# Altium PCB my.PcbDoc
Units mil, origin at the board's own origin, x right, y up, seen from the top; angles counter-clockwise.
Board outline 4170.03 x 3910.03 mil, 2 copper layers (Top Layer, Bottom Layer); 77 components, 66 nets, 230 pads, 22 vias.
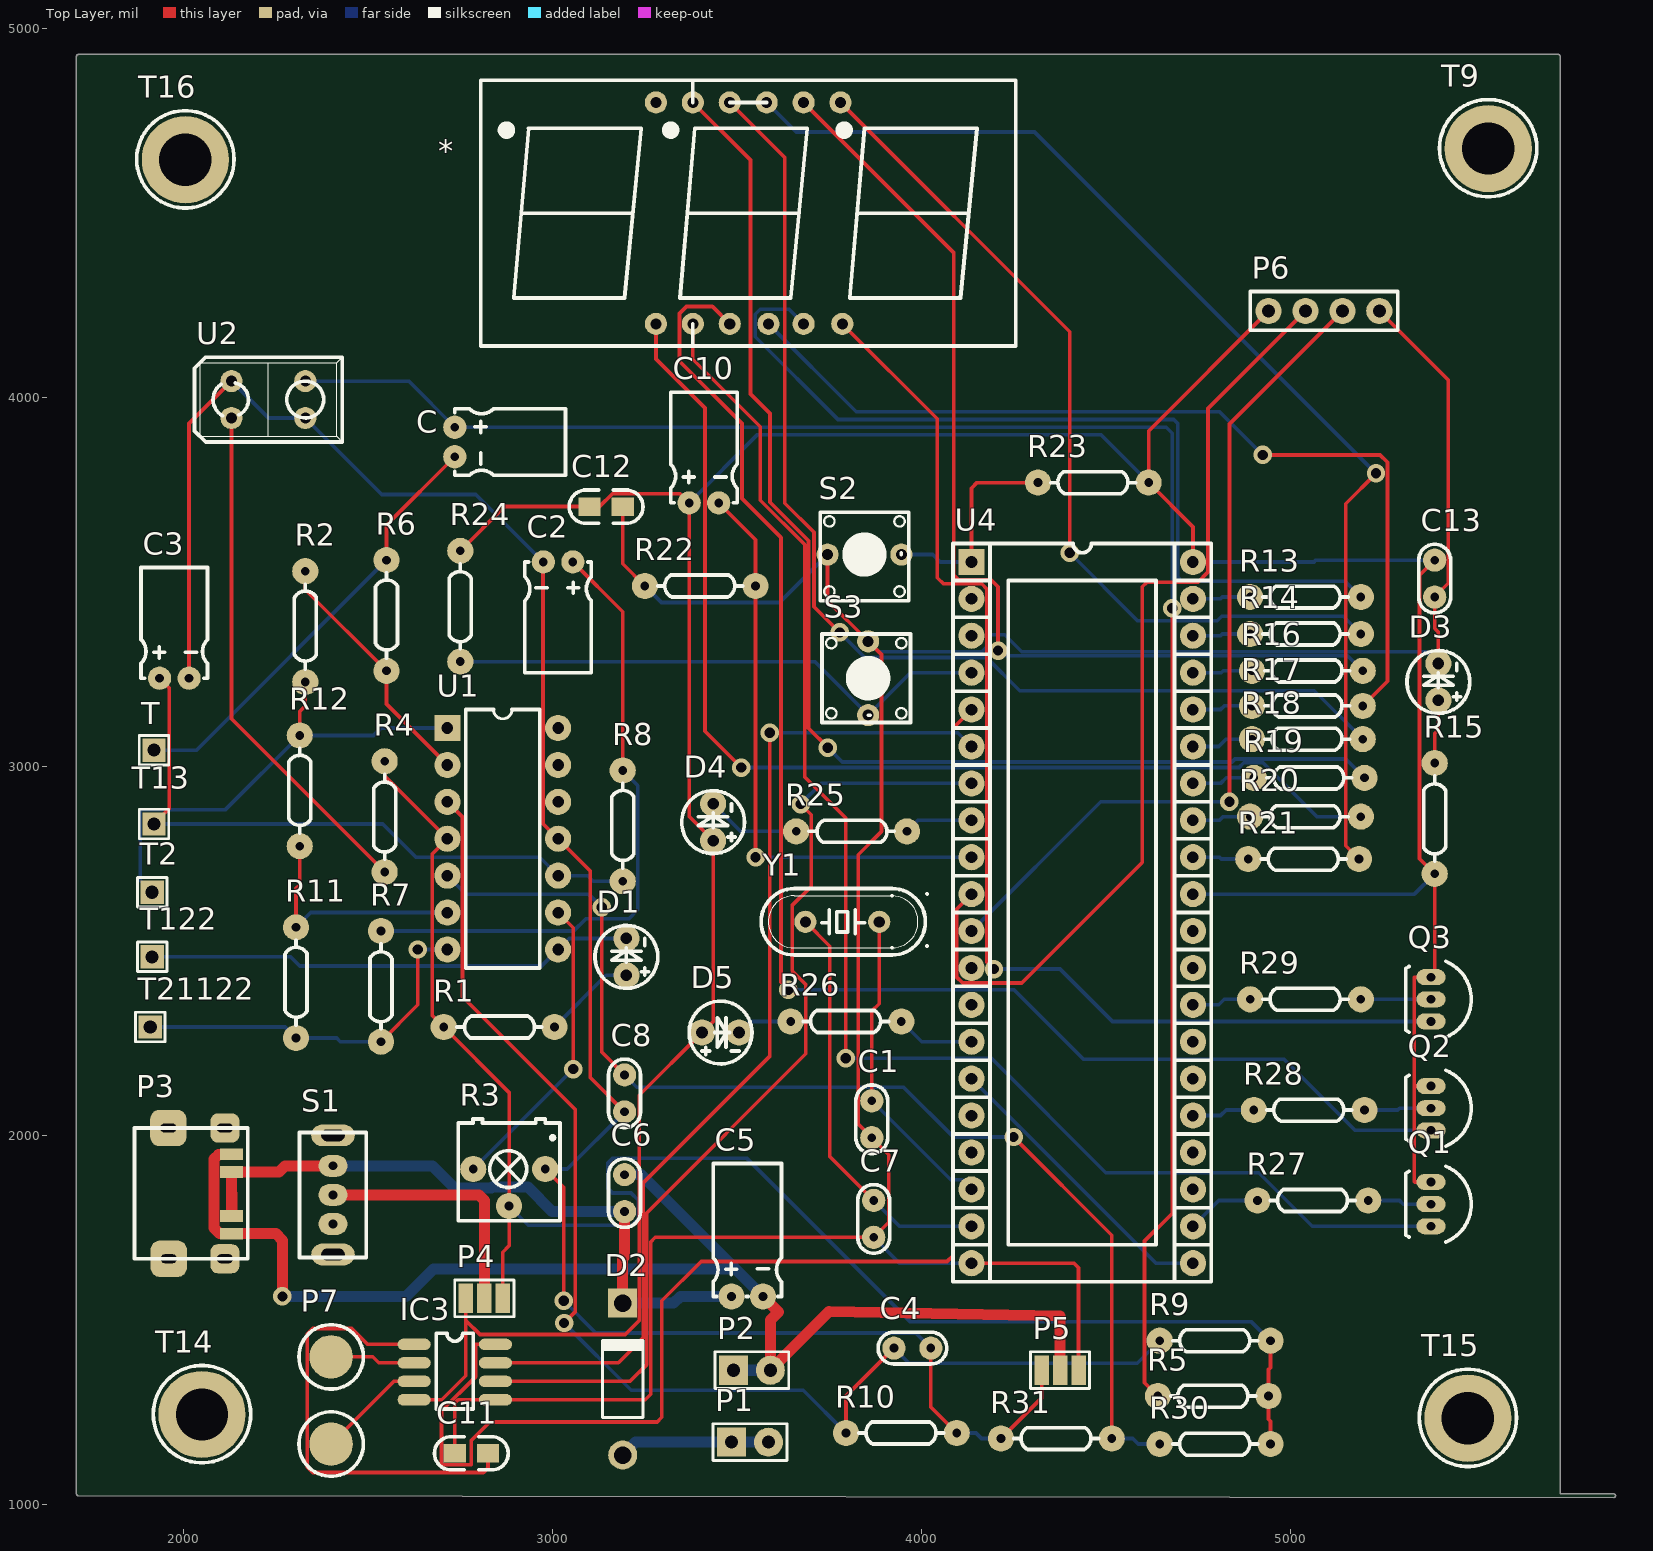
[diagram p0: Top Layer view]
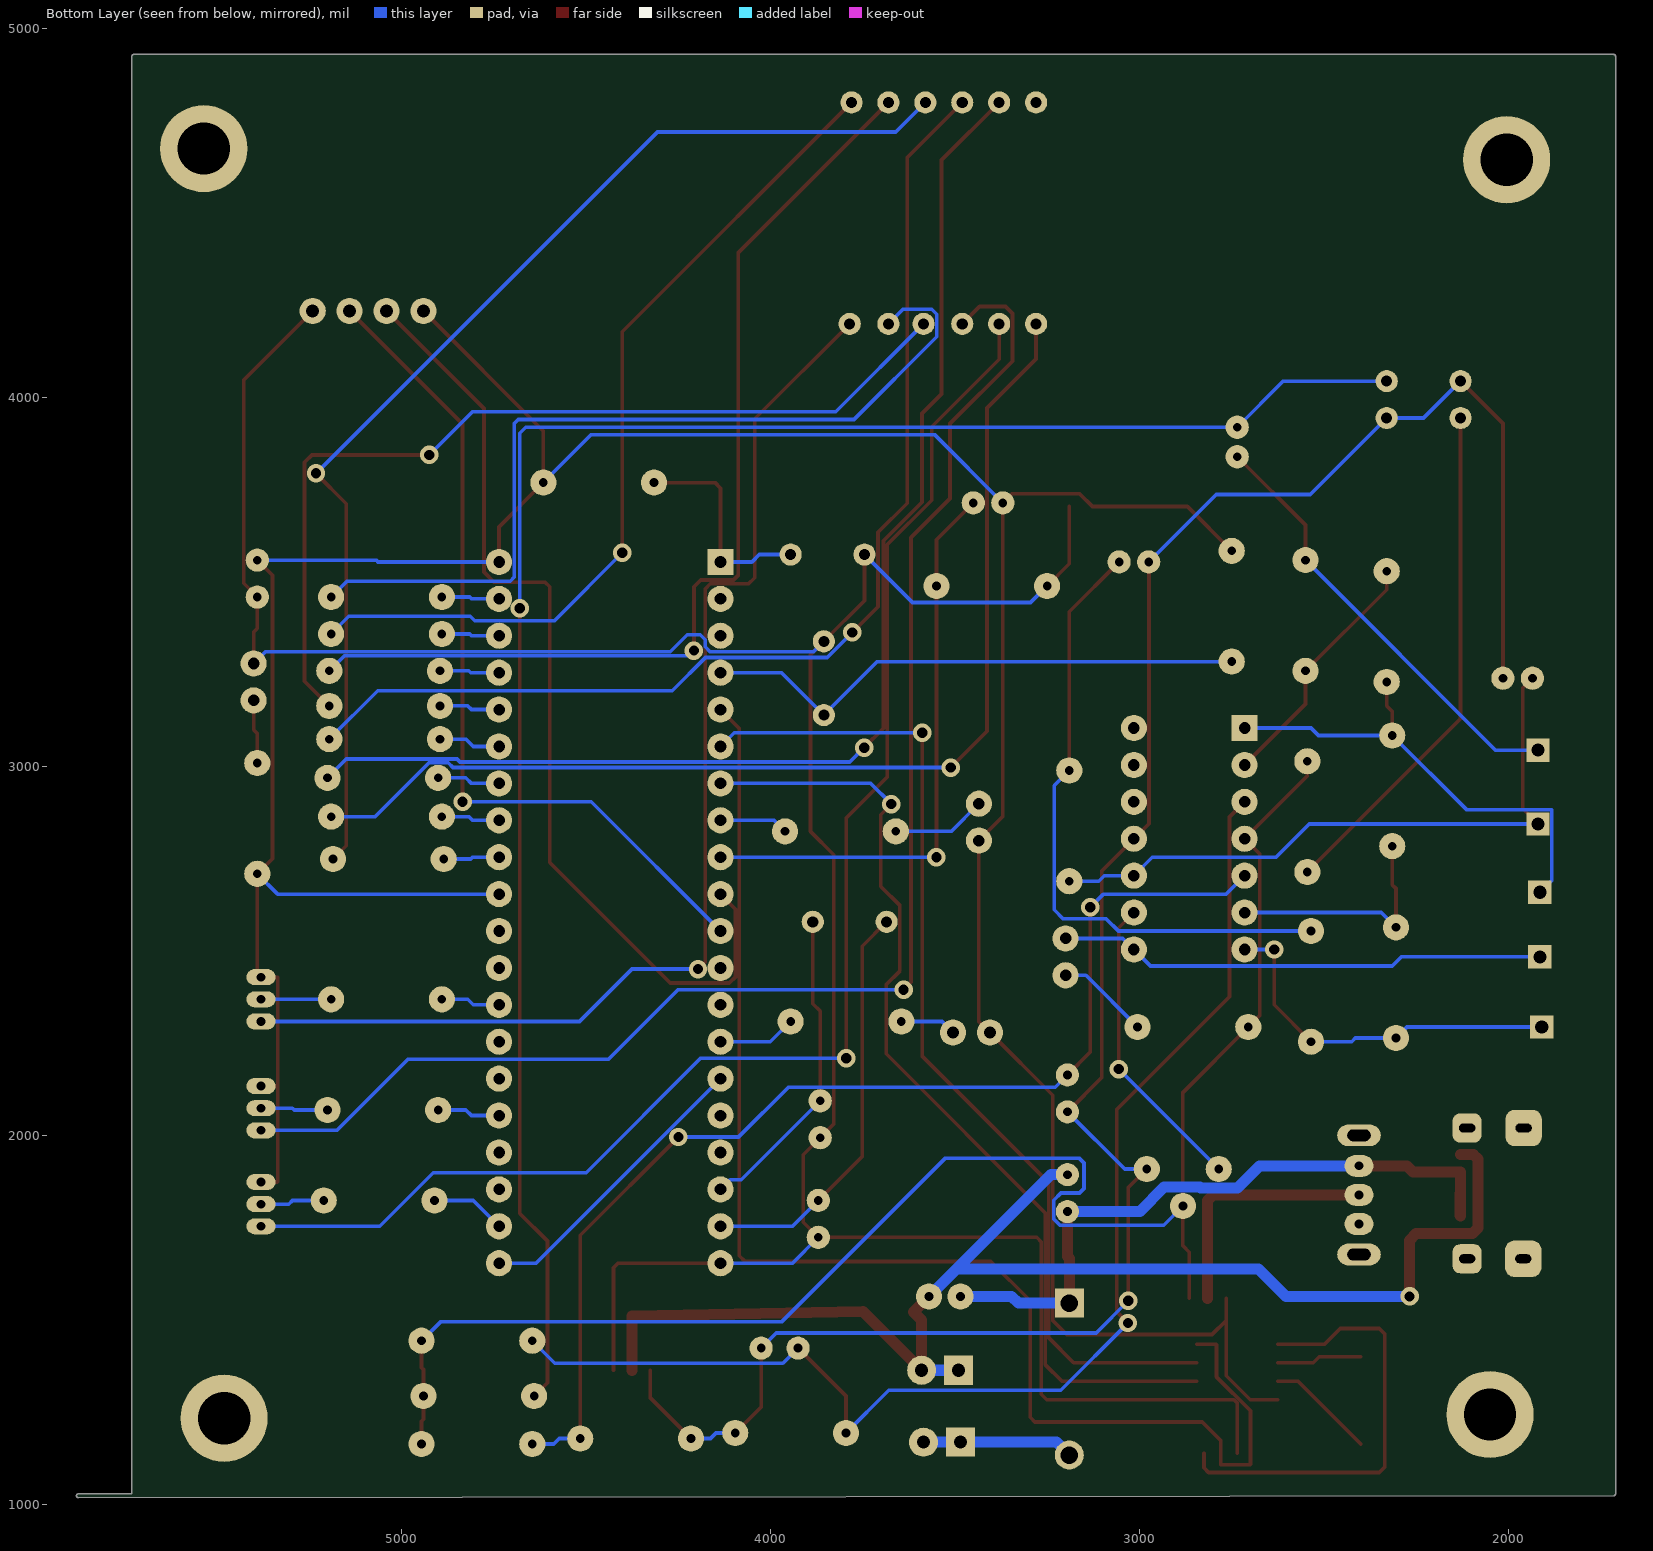
[diagram p1: Bottom Layer view, seen from below]

## Layer stack, top to bottom
Top Solder: solder mask 0.4, Solder Resist, Dk 3.5
Top Layer: signal copper 1.4
Dielectric 1: dielectric 12.6, FR-4, Dk 4.8
Bottom Layer: signal copper 1.4
Bottom Solder: solder mask 0.4, Solder Resist, Dk 3.5

## Board outline
1709.98,1030 ccw(c1715,1030) 1714.99,1024.98 5874.99,1019.99 ccw(c5875,1025) 5880.02,1025 ccw(c5875,1025) 5875.01,1030.02 5730.02,1030.19 5730.02,4925 ccw(c5725,4925) 5725,4930.02 1715,4930.02 ccw(c1715,4925) 1709.98,4925

## Design rules (kind name [scope] priority, off if disabled: settings)
Clearance [All] p1: gap=0.25 ignorepadtopadclearanceinfootprint=TRUE
HoleSize [All] p1: absolutevalues=TRUE maxlimit=300 minlimit=1 maxpercent=80.000 minpercent=20.000
MinimumSolderMaskSliver [All] p1: minsoldermaskwidth=0
PolygonConnect [All] p1: connectstyle=Relief reliefconductorwidth=10 reliefentries=4 polygonreliefangle="90 Angle" airgapwidth=10
RoutingVias [All] p1: holewidth=28 width=50 viastyle="Through Hole" minholewidth=28 minwidth=50 maxholewidth=28 maxwidth=50
SilkToSilkClearance [All] p1: silktosilkclearance=0
SilkToSolderMaskClearance [IsPad] p1: minsilkscreentomaskgap=0 clearancetoexposedcopper=TRUE
SolderMaskExpansion [All] p1: expansion=4 istentingtop=FALSE
Width Width_ag [InNet('AGND')] p1: maxlimit=30 minlimit=10 preferedwidth=10 minimp=50.000000 maximp=50.000000 favimp=50.000000
Width Width_g [InNet('GND')] p2: maxlimit=30 minlimit=10 preferedwidth=30 minimp=50.000000 maximp=50.000000 favimp=50.000000
Width Width_51 [InNet('+5V1')] p3: maxlimit=30 minlimit=10 preferedwidth=30 minimp=50.000000 maximp=50.000000 favimp=50.000000
Width Width_5v [InNet('+5.7V')] p4: maxlimit=30 minlimit=10 preferedwidth=30 minimp=50.000000 maximp=50.000000 favimp=50.000000
Width Width_5 [InNet('+5V')] p5: maxlimit=30 minlimit=10 preferedwidth=30 minimp=50.000000 maximp=50.000000 favimp=50.000000
Width Width_1 [All] p6: maxlimit=10 minlimit=10 preferedwidth=10
26 further rules are at their usual default settings.

## Components (designator, comment, footprint, x,y, rotation, side; value= is the part's Value field where it differs from the comment)
* "tt" smg 3535,4740 r180 top
C "Cap Pol1" cd-0.1t 2735,3920 r0 top value=10uF
C1 "Cap" C-0.1 3865,1995 r90 top value=30pF
C2 "Cap Pol1" cd-0.1t 3055,3555 r270 top value=0.47uF
C3 "Cap Pol1" cd-0.1t 1935,3240 r90 top value=0.47uF
C4 "Cap" C-0.1 4025,1425 r180 top value=104
C5 "Cap Pol1" CD-0.2T 3485,1565 r90 top value=100uF
C6 "Cap" C-0.1 3195,1795 r90 top value=104
C7 "Cap" C-0.1 3870,1825 r270 top value=30pF
C8 "Cap" C-0.1 3195,2065 r90 top value=100pF
C10 "Cap Pol1" cd-0.1t 3370,3715 r90 top value=100pF
C11 "Cap" C0805R 2825,1140 r180 top value=100pF
C12 "Cap" C0805R 3190,3705 r180 top value=100pF
C13 "Cap" C-0.1 5390,3560 r270 top value=104
D1 "LED0" LED3 3200,2435 r90 top
D2 "Diode 1N4007" DO-41 3190,1340.91 r90 top
D3 "LED0" LED3 5400,3180 r90 top
D4 "LED0" LED3 3435,2800 r90 top
D5 "LED0" LED3 3405,2280 r0 top
IC3 "NY3P065" sop8 2755,1345 r0 top
P1 "Header 2" SIP2 3485,1170 r0 top
P2 "Header 2" SIP2 3490,1365 r0 top
P3 "Header 6" USBTYPEC6 2112,1667 r90 top
P4 "Header 3" JUMP3 2865,1560 r0 top
P5 "Header 3" JUMP3 4325,1365 r180 top
P6 "Header 4" SIP4 4940,4235 r0 top
P7 "Header 2" BEEP2 2400,1401.22 r270 top
Q1 "2N3906" TO92C 5380,1875 r270 top
Q2 "2N3906" TO92C 5380,2135 r270 top
Q3 "2N3906" TO92C 5380,2430 r270 top
R1 "Res2" R-0.3 3005,2295 r180 top value=1K
R2 "Res2" R-0.3 2330,3530 r270 top value=300K
R3 "RPot" 3362P 2980,1910 r180 top value=10K
R4 "Res2" R-0.3 2545,2715 r90 top value=2K
R5 "Res2" R-0.3 4640,1295 r0 top value=30K
R6 "Res2" R-0.3 2550,3560 r270 top value=3K
R7 "Res2" R-0.3 2535,2255 r90 top value=3K
R8 "Res2" R-0.3 3190,2990 r270 top value=30K
R9 "Res2" R-0.3 4645,1445 r0 top value=180K
R10 "Res2" R-0.3 3795,1195 r0 top value=100K
R11 "Res2" R-0.3 2305,2565 r270 top value=300K
R12 "Res2" R-0.3 2315,3085 r270 top value=3K
R13 "" R-0.3 4890,3460 r0 top value=100
R14 "" R-0.3 4890,3360 r0 top value=100
R15 "Res2" R-0.3 5390,2710 r90 top value=1K
R16 "" R-0.3 4895,3260 r0 top value=100
R17 "" R-0.3 4895,3165 r0 top value=100
R18 "" R-0.3 4895,3075 r0 top value=100
R19 "" R-0.3 4900,2970 r0 top value=100
R20 "" R-0.3 4890,2865 r0 top value=100
R21 "" R-0.3 4885,2750 r0 top value=100
R22 "Res2" R-0.3 3250,3490 r0 top value=10K
R23 "Res2" R-0.3 4315,3770 r0 top value=10K
R24 "Res2" R-0.3 2750,3285 r90 top value=10K
R25 "Res2" R-0.3 3960,2825 r180 top value=1K
R26 "Res2" R-0.3 3645,2310 r0 top value=1K
R27 "" R-0.3 4910,1825 r0 top value=4.7K
R28 "" R-0.3 4900,2070 r0 top value=4.7K
R29 "" R-0.3 4890,2370 r0 top value=4.7K
R30 "Res2" R-0.3 4645,1165 r0 top value=180K
R31 "Res2" R-0.3 4215,1180 r0 top value=100K
S1 "SW-SPST" POW3 2405,1918.74 r270 top
S2 "SW-PB" key 3800,3560 r180 top
S3 "SW-PB" key 3840,3285 r90 top
T "TEST" SIP1 1920,3045 r90 top
T2 "TEST" SIP1 1915,2660 r0 top
T9 "TEST" HLS 5535,4675 r0 top
T13 "TEST" SIP1 1920,2845 r0 top
T14 "TEST" HLS 2050,1245 r0 top
T15 "TEST" HLS 5480,1235 r0 top
T16 "TEST" HLS 2005,4645 r0 top
T122 "TEST" SIP1 1915,2485 r90 top
T21122 "TEST" SIP1 1910,2295 r90 top
U1 "LM324AN" DIP14MY 2715,3105 r270 top
U2 "Optoisolator1" sen 2160,4005 r0 top
U4 "P89C51RC2BN/01" DIP40 4135,3555 r0 top
Y1 "XTAL" jz 3790,2570 r0 top

## Footprints (in the part's own frame and the unit in brackets; to place one, negate y for a bottom-side part, rotate by r counter-clockwise, add the part's x,y. Pads: shape width x height; smd on the part's side, far side on the other; paste and mask are expansions set on the pad)
3362P [mm]
  round 1.8 hole 0.6: 1(0,0) 2(2.484,2.54) 3(4.953,0)
  silkscreen extent -1.02,-3.44 5.98,3.56
BEEP2 [mm]
  round 3 smd: 1(0,0) 2(6,0)
  silkscreen extent -2.21,-2.22 8.21,2.22
C0805R [mil]
  rect 60x50 smd: 1(0,0) 2(90,0)
  silkscreen extent -55,-45 145,45
C-0.1 [mm]
  round 1.6 hole 0.6: 1(0,0) 2(2.54,0)
  silkscreen extent -1.09,-1.1 3.63,1.1
cd-0.1t [mm]
  round 1.6 hole 0.6: 1(0,0) 2(0,-2.032)
  silkscreen extent 0,-3.3 7.62,1.27
CD-0.2T [mm]
  round 1.8 hole 0.6: 1(0,0) 2(0,-2.159)
  silkscreen extent 0,-3.43 9.14,1.27
DIP14MY [mm]
  rect 1.8x1.8 hole 0.8: 1(0,0)
  round 1.8 hole 0.8: 2(2.54,0) 3(5.08,0) 4(7.62,0) 5(10.16,0) 6(12.7,0) 7(15.24,0) 8(15.24,7.62) 9(12.7,7.62) 10(10.16,7.62) 11(7.62,7.62) 12(5.08,7.62) 13(2.54,7.62) 14(0,7.62)
  silkscreen extent -1.27,1.27 16.51,6.35
DIP40 [mm]
  rect 1.8x1.8 hole 0.8: 1(0,0)
  round 1.8 hole 0.8: 2(0,-2.54) 3(0,-5.08) 4(0,-7.62) 5(0,-10.16) 6(0,-12.7) 7(0,-15.24) 8(0,-17.78) 9(0,-20.32) 10(0,-22.86) 11(0,-25.4) 12(0,-27.94) 13(0,-30.48) 14(0,-33.02) 15(0,-35.56) 16(0,-38.1) 17(0,-40.64) 18(0,-43.18) 19(0,-45.72) 20(0,-48.26) 21(15.24,-48.26) 22(15.24,-45.72) 23(15.24,-43.18) 24(15.24,-40.64) 25(15.24,-38.1) 26(15.24,-35.56) 27(15.24,-33.02) 28(15.24,-30.48) 29(15.24,-27.94) 30(15.24,-25.4) 31(15.24,-22.86) 32(15.24,-20.32) 33(15.24,-17.78) 34(15.24,-15.24) 35(15.24,-12.7) 36(15.24,-10.16) 37(15.24,-7.62) 38(15.24,-5.08) 39(15.24,-2.54) 40(15.24,0)
  silkscreen extent -1.27,-49.53 16.51,1.27
DO-41 [mm] "Diode, Axial; Body 5.2 x 2.7 mm (LxDia. max), Lead Dia. 0.86 mm (max)"
  round 2 hole 1.2: 1(-5.23,0)
  rect 2x2 hole 1.2: 2(5.23,0)
  silkscreen extent -2.65,-1.4 2.75,1.4
HLS [mm]
  round 6 hole 3.6: 1(0,0)
  silkscreen extent -3.35,-3.32 3.35,3.37
JUMP3 [mm]
  rect 1x2 smd: 1(0,0) 2(-1.27,0) 3(-2.54,0)
  silkscreen extent -3.3,-1.27 0.76,1.27
jz [mil]
  round 60 hole 30: 1(-105,10) 2(95,10)
  silkscreen extent -225,-80 225,100
key [mil]
  round 60 hole 30: 1(-145,-15) 2(55,-15)
  silkscreen extent -165,-130 75,110
LED3 [mm]
  round 1.8 hole 0.8: 1(0,0) 2(2.54,0)
  silkscreen extent -0.89,-2.16 3.43,2.16
POW3 [mm]
  oval 1.5x3 hole 0.8 slot 1.6 at 90 deg: 0(-2.1,0) 0(6.1,0)
  oval 1.5x2 hole 0.6: 1(0,0) 2(2,0) 3(4,0)
  silkscreen extent -2.3,-2.3 6.3,2.3
R-0.3 [mm]
  round 1.8 hole 0.6: 1(0,0) 2(7.62,0)
  silkscreen extent 0.89,-0.76 6.73,0.75
sen [mil]
  round 60 hole 30: 1(-30,-60) 2(-30,40) 3(170,-60) 4(170,40)
  silkscreen extent -130,-125 270,105
SIP1 [mm]
  rect 1.6x1.6 hole 0.9: 1(0,0)
  silkscreen extent -1.02,-1.02 1.02,1.02
SIP2 [mm] "Connector; Header; 2 Position"
  rect 2x2 hole 0.9: 1(0,0)
  round 2 hole 0.9: 2(2.54,0)
  silkscreen extent -1.27,-1.27 3.81,1.27
SIP4 [mm]
  round 1.8 hole 0.9: 1(0,0) 2(2.54,0) 3(5.08,0) 4(7.62,0)
  silkscreen extent -1.27,-1.32 8.89,1.35
smg [mil]
  round 60 hole 30: 1(-245,-60) 2(-145,-60) 3(-45,-60) 4(55,-60) 5(155,-60) 6(255,-60) 7(255,540) 8(155,540) 9(55,540) 10(-50,540) 11(-145,540) 12(-250,540)
  silkscreen extent -720,-120 730,600
sop8 [mil]
  rrect100% 90x31 smd: 1(-130,90) 2(-130,40) 3(-130,-10) 4(-130,-60) 5(90,-60) 6(90,-10) 7(90,40) 8(90,90)
  silkscreen extent -70,-85 30,120
TO92C [mm]
  oval 1.1x2 hole 0.6: 1(0,0) 2(1.524,0) 3(3.048,0)
  silkscreen extent -1.09,-1.74 4.13,2.77
USBTYPEC6 [mm]
  rrect50% 2.5x2.5 hole 0.6 slot 1.1 at 90 deg: 0(0,3.861) 0(9,3.886)
  rrect50% 2x2 hole 0.6 slot 1.1 at 90 deg: 0(0,0) 0(9,0)
  rect 0.8x1.6 smd: 1(1.727,-0.457) 2(2.946,-0.457) 5(5.972,-0.457) 6(7.188,-0.457)
  silkscreen extent 0,-1.57 9,6.22

## Part data
C C2 C3 C5 C10: "Polarized Capacitor (Radial)", LatestRevisionDate=17-Jul-2002, LatestRevisionNote="Re-released for DXP Platform.", PackageDescription="Polarized Capacitor (Radial); 2 Leads", PackageReference=RB7.6-15, Published=8-Jun-2000, Publisher="Altium Limited"
C1 C4 C6 C7 C8 C11 C12 C13: "Capacitor", LatestRevisionDate=17-Jul-2002, LatestRevisionNote="Re-released for DXP Platform.", PackageDescription="Radial Cap, Thru-Hole; 2 Leads; 0.3 in Pin Spacing", PackageReference=RAD-0.3, Published=8-Jun-2000, Publisher="Altium Limited"
D1 D3 D4 D5: "Typical INFRARED GaAs LED", LatestRevisionDate=08-Jul-2005, LatestRevisionNote="Mech Layer 1 removed.", PackageDescription="LED; 2 Leads", PackageReference=LED-0, Published=8-Jun-2000, Publisher="Altium Limited"
D2: "1 Amp General Purpose Rectifier", Code_JEDEC=DO-204-AL, ComponentLink1Description="Manufacturer Link", ComponentLink1URL=http://www.fairchildsemi.com/, ComponentLink2Description=Datasheet, ComponentLink2URL=http://www.fairchildsemi.com/ds/1N%2F1N4001.pdf, DatasheetVersion=1998, LatestRevisionDate=17-Jul-2002, LatestRevisionNote="Re-released for DXP Platform.", PackageDescription="Diode, Axial; Body 5.2 x 2.7 mm (LxDia. max), Lead Dia. 0.86 mm (max)", PackageReference=DO-41, PackageVersion=Aug-1999, Published=8-Jun-2000, Publisher="Altium Limited"
IC3: library part SOUND
P1 P2 P7: "Header, 2-Pin", LatestRevisionDate=17-Jul-2002, LatestRevisionNote="Re-released for DXP Platform.", Publisher="Altium Limited"
P3: "Header, 6-Pin", LatestRevisionDate=17-Jul-2002, LatestRevisionNote="Re-released for DXP Platform.", Publisher="Altium Limited"
P4 P5: "Header, 3-Pin", LatestRevisionDate=17-Jul-2002, LatestRevisionNote="Re-released for DXP Platform.", Publisher="Altium Limited"
P6: "Header, 4-Pin", LatestRevisionDate=17-Jul-2002, LatestRevisionNote="Re-released for DXP Platform.", Publisher="Altium Limited"
Q1 Q2 Q3: "PNP General Purpose Amplifier", ComponentLink1Description="Manufacturer Link", ComponentLink1URL=http://www.fairchildsemi.com/, ComponentLink2Description=Datasheet, ComponentLink2URL=http://www.fairchildsemi.com/ds/2N%2F2N3906.pdf, DatasheetVersion=1997, LatestRevisionDate=15-Jan-2003, LatestRevisionNote="PCB Footprint 'BCY-W3/D4.7' replaced", PackageDescription="TO, Flat Index; 3 In-Line, Axial Leads; Body Dia. 4.5mm; Leads 0.51 x 0.48 mm (max)", PackageReference=TO-92A, PackageVersion=Sep-1998, Published=8-Jun-2000, Publisher="Altium Limited"
R1 R2 R4 R5 R6 R7 R8 R9 R10 R11 R12 R15 R22 R23 R24 R25 R26 R30 R31: "Resistor", LatestRevisionDate=17-Jul-2002, LatestRevisionNote="Re-released for DXP Platform.", PackageDescription="Axial Device, Thru-Hole; 2 Leads; 0.4 in Pin Spacing", PackageReference=AXIAL-0.4, Published=8-Jun-2000, Publisher="Altium Limited"
R3: "Potentiometer", LatestRevisionDate=17-Jul-2002, LatestRevisionNote="Re-released for DXP Platform.", PackageDescription="Variable Resistor, Thru-Hole; 3 Leads", PackageReference=VR5, Published=8-Jun-2000, Publisher="Altium Limited", Set Position=0.5, Sim Note="Enter the Resistance value and the set point into parameter fields."
R13 R14 R16 R17 R18 R19 R20 R21 R27 R28 R29: library part Res2, "Resistor", LatestRevisionDate=17-Jul-2002, LatestRevisionNote="Re-released for DXP Platform.", PackageDescription="Axial Device, Thru-Hole; 2 Leads; 0.4 in Pin Spacing", PackageReference=AXIAL-0.4, Published=8-Jun-2000, Publisher="Altium Limited"
S1: "Single-Pole, Single-Throw Switch", LatestRevisionDate=17-Jul-2002, LatestRevisionNote="Re-released for DXP Platform.", PackageDescription="Switch; 2 Leads", PackageReference=SPST-2, Published=24-Mar-1999, Publisher="Altium Limited"
S2 S3: "Switch", LatestRevisionDate=17-Jul-2002, LatestRevisionNote="Re-released for DXP Platform.", PackageDescription="Switch; 2 Leads", PackageReference=SPST-2, Published=24-Mar-1999, Publisher="Altium Limited"
U1: "Low Power Quad Operational Amplifier", DigiKeyPartNumber=LM324ANNS-ND, Manufacturer="National Semiconductor", PackageTopMarking=NSUZXYYTTE#*LM324AN, Code_JEDEC=MS-001-AA, ComponentLink1Description="LM324 Datasheet", ComponentLink1URL=http://www.national.com/ds/LM/LM324.pdf, ComponentLink2Description="LM324 Web Page", ComponentLink2URL=http://www.national.com/pf/LM/LM324.html, ComponentLink3Description="N14A Package Page", ComponentLink3URL=http://www.national.com/packaging/folders/n14a.html, CompType=Amplifiers, DatasheetVersion=Aug-2000, LatestRevisionDate=13-Jan-2009, LatestRevisionNote="Sim Model Added.", PackageDescription="MDIP, .750 x .250 x.130in, 14 Lead, .100in Pitch", PackageReference=N14A, PackageVersion="revG, May-2006", PartNumber=LM324AN, PinCount=14, Published=4-Dec-2008, Publisher="Altium Limited", RoHS=O
U2: "4-Pin Phototransistor Optocoupler", DatasheetVersion=Nov-2003, LatestRevisionDate=04-Mar-2005, LatestRevisionNote="Sch pins 3 & 4 Swapped.", PackageReference=DIP-4, Published=24-Mar-1999, Publisher="Altium Limited"
U4: "80C51 8-Bit Flash Microcontroller Family, 32 kB ISP/IAP Flash with 512 B RAM.", Code_JEDEC=MO-015, ComponentLink1Description="Manufacturer Link", ComponentLink1URL=http://www-us2.semiconductors.philips.com/, ComponentLink2Description=Datasheet, ComponentLink2URL=http://www.semiconductors.philips.com/acrobat/datasheets/P89C51RA2_RB2_RC2_RD2_2.pdf, DatasheetVersion=18-Jul-2002, PackageDescription="DIP, Plastic; 40 Leads; Row Spacing 15.24 mm; Pitch 2.54 mm", PackageReference=SOT129-1, PackageVersion=Aug-2000, Published=21-May-2003, Publisher="Altium Limited"
Y1: "Crystal Oscillator", LatestRevisionDate=17-Jul-2002, LatestRevisionNote="Re-released for DXP Platform.", PackageDescription="Crystal, Thru-Hole; 2 Leads; Body 3.1 x 8.2 mm (Dia.xH)", PackageReference=R38, Published=8-Jun-2000, Publisher="Altium Limited"

## Via types
v1: diameter 50, hole 28, Top Layer to Bottom Layer, 22 vias

## Nets (pads, with @x,y where several pads share a name; then routed paths per layer and width w, separated by ;. In a path a pad name is that pad's centre, name@x,y a point inside that pad or via, vN(x,y) a via of type N, cw(c..) or ccw(c..) an arc to the next point about the centre after c; other vN are vias at no path point)
+5.7V: D2.1 P1.1 P1.2 | length 409.5
  Bottom Layer w30: D2.1 3225,1170 P1.1 P1.2
+5V: P4.2 S1.2 | length 681.2
  Top Layer w30: S1.2 2800,1840 2815,1825 P4.2
+5V1: C5.1 C6.1 D2.2 P3.2 P3.5 S1.1 | length 1797.3
  Top Layer w30: P3.2 2130.75,1783.75 2130.75,1844.26 2130,1845 P3.5 2259,1902.11 2275.63,1918.74 S1.1 ; D2.2 3190,1668 3195,1673 C6.1
  Bottom Layer w30: S1.1 2674.26,1918.74 2734,1859 2834,1859 2836,1861 2933,1861 2999,1795 C6.1 ; D2.2 3328,1546.81 3346.19,1565 C5.1
+5VA: P4.1 R1.2 R3.2 R4.2 R5.2 R9.2 R30.2 U1.4 | length 4517.8
  Top Layer w10: R4.2 2545,2975 U1.4 2674,2764 2674,2326 R1.2 2882.2,2117.8 R3.2 2882.2,1702.2 2865,1685 P4.1 ; R30.2 4945,1227 4940,1232 R5.2 4940,1367 4945,1372 R9.2
  Bottom Layer w10: R3.2 2934.2,1758 3215,1758 3232,1775 3232,1825.5 3212.5,1845 3162.5,1845 3150,1857.5 3150,1926.5 3162.5,1939 3527,1939 3970,1496 4894,1496 R9.2
+5VD: C10.1 C12.2 C13.1 D4.1 D5.1 IC3.4 P4.3 P6.1 Q1.1 Q2.1 Q3.1 R15.1 R23.2 R24.2 U4.31 U4.40 | length 9335.1
  Top Layer w10: IC3.4 2700,1285 2765,1350 2765,1500 ; R24.2 2870,3705 C12.2 3127,3705 3162,3740 3345,3740 C10.1 3370,2865 D4.1 3435,2310 D5.1 3235,2110 3235,1500 3196.9,1461.9 2803.1,1461.9 2765,1500 ; P4.3 2765,1500 ; U4.40 4735,3650 R23.2 4615,3910 P6.1 ; Q1.1 5336,1875 5335,1876 5335,2134 5336,2135 ; Q2.1 5336,2135 ; C13.1 5349,3519 5349,2751 R15.1 5390,2430 Q3.1 5336,2430 5335,2429 5335,2136 5336,2135
  Bottom Layer w10: C10.1 3555,3900 4485,3900 R23.2 ; U4.31 5335,2655 R15.1 ; U4.40 5063,3555 5068,3560 C13.1
AGND: C2.2 C3.2 C4.1 C8.1 P5.1 R3.1 R10.2 R31.1 U1.11 U2.2 U2.3 | length 5803.8
  Top Layer w10: C3.2 2015,3930 U2.2 ; C2.2 2974,3555 2974,2846 U1.11 3102,2718 3102,2158 C8.1 ; R3.1 3030,1860 v1(3030,1553) ; C4.1 4025,1265 R10.2 ; R31.1 4325,1290 P5.1
  Bottom Layer w10: U2.2 2230,3945 U2.3 2537,3738 2792,3738 C2.2 ; R3.1 3040,1910 C8.1 ; v1(3030,1553) 3117,1466 3984,1466 C4.1 ; R10.2 4147,1195 4162,1180 R31.1
DGND: C1.1 C7.2 C11.2 C12.1 C13.2 D3.2 IC3.5 P5.3 P6.4 R22.1 S2.2 S3.2 U4.20 | length 8031.6
  Top Layer w10: C11.2 2735,1276 2744,1285 IC3.5 3251,1285 3266,1300 3266,1712.5 3278.5,1725 C7.2 3911,1766 3911,1949 C1.1 3828,2032 3828,2762 3891,2825 3891,3304 S3.2 3745,3450 S2.2 ; C12.1 3190,3550 R22.1 ; U4.20 4412.5,1655 4425,1642.5 P5.3 ; P6.4 5427,4048 5427,3497 C13.2 5390,3375 5400,3365 D3.2
  Bottom Layer w10: R22.1 3295,3445 3615,3445 S2.2 ; S3.2 3883,3312 4163.5,3312 4176.5,3325 4176.5,3344.44 4189.81,3357.75 4225.44,3357.75 4271.2,3312 5368,3312 D3.2 ; C7.2 3940,1655 U4.20
GND: C5.2 C6.2 P2.1 P2.2 P3.1 P3.6 P5.2 | length 3684.5
  Top Layer w30: P3.6 2095.5,1950 2083,1937.5 2083,1750 2098,1735 P3.1 2250,1735 2268,1717 v1(2268,1565) ; C5.2 3611.75,1523.25 3590,1501.5 P2.2 3749,1524 4375,1511.5 P5.2
  Bottom Layer w30: v1(2268,1565) 2603,1565 2677,1639 3496,1639 ; C6.2 3240,1895 3496,1639 ; P2.1 P2.2 ; C5.2 3496,1639
Net*_1: *.1 R14.2 | length 2367.3
  Top Layer w10: *.1 4401,4179 v1(4401,3580)
  Bottom Layer w10: v1(4401,3580) 4585,3396 4801,3396 4813,3408 5142,3408 R14.2
Net*_2: *.2 R16.2 | length 2765.9
  Top Layer w10: *.2 4086.56,4393.44 4086.56,3519.38 4100,3505.94 4188.56,3505.94 4207,3487.5 v1(4207,3315)
  Bottom Layer w10: v1(4207,3315) 4221,3301 5154,3301 R16.2
Net*_3: *.3 R21.2 | length 3161.2
  Top Layer w10: R21.2 5149,2786 5149,3713 v1(5231,3795)
  Bottom Layer w10: *.3 3660,4720 4306,4720 v1(5231,3795)
Net*_4: *.4 R18.2 | length 3096.1
  Top Layer w10: *.4 3629,4651 3629,3714.34 3708.15,3635.19 3708.15,3433.85 v1(3778,3364)
  Bottom Layer w10: v1(3778,3364) 3846,3296 4176,3296 4266,3206 5064,3206 R18.2
Net*_5: *.5 R19.2 | length 3394.1
  Top Layer w10: *.5 3536,4644 3536,4010 3589,3957 3589,3717 3693.5,3612.5 3693.5,3104.5 v1(3746,3052)
  Bottom Layer w10: v1(3746,3052) 3785,3013 4841.12,3013 4849.06,3020.94 5149.06,3020.94 R19.2
Net*_7: *.7 R20.2 | length 3042.3
  Top Layer w10: *.7 3280,4105 3413,3972 3413,3096 v1(3511,2998)
  Bottom Layer w10: v1(3511,2998) 4860,2998 4872.69,3010.69 4925,3010.69 5070.69,2865 R20.2
Net*_8: *.8 Q1.3 | length 3936
  Top Layer w10: *.8 3380,4104 3562.52,3921.48 3562.52,3722.48 3683,3602 3683,2972 3794,2861 v1(3794,2210)
  Bottom Layer w10: v1(3794,2210) 4189,2210 4499,1900 4913,1900 5058,1755 Q1.3
Net*_9: *.9 Q2.3 | length 4016.6
  Top Layer w10: *.9 3433,4247 3362.5,4247 3344,4228.5 3344,4099 3513,3930 3513,3727 3619,3621 3619,2416 v1(3639,2396)
  Bottom Layer w10: v1(3639,2396) 4250,2396 4438,2208 4981,2208 5174,2015 Q2.3
Net*_10: *.10 R17.2 | length 2520.1
  Top Layer w10: v1(4924,3845) 5242,3845 5262,3825 5262,3232 R17.2
  Bottom Layer w10: *.10 3823,3962 4807,3962 v1(4924,3845)
Net*_11: *.11 R13.2 | length 2390.7
  Bottom Layer w10: *.11 3640.5,4239.5 3562.5,4239.5 3549,4226 3549,4165 3773,3941 4683,3941 4694,3930 4694,3514 4705,3503 5147,3503 R13.2
Net*_12: *.12 Q3.3 | length 3221.7
  Top Layer w10: *.12 4042.12,3942.88 4042.12,3512.5 4058.94,3495.69 4162.5,3495.69 4176,3482.19 4176,2472 v1(4196,2452)
  Bottom Layer w10: v1(4196,2452) 4375,2452 4517,2310 Q3.3
NetC1_2: C1.2 U4.18 Y1.2 | length 862.7
  Top Layer w10: C1.2 3865,2338 3885,2358 Y1.2
  Bottom Layer w10: C1.2 4079,1881 4109,1881 U4.18
NetC2_1: C2.1 R7.2 R8.1 | length 1735.2
  Top Layer w10: C2.1 3190,3420 R8.1
  Bottom Layer w10: R7.2 3057,2555 3090.51,2588.51 3207.01,2588.51 3231,2612.5 3231,2949 R8.1
NetC3_1: C3.1 R8.2 T13.1 U1.10 | length 1757
  Top Layer w10: T13.1 1961,2886 1961,3214 C3.1
  Bottom Layer w10: T13.1 2540,2845 2630,2755 2965,2755 U1.10 3095,2705 3110,2690 R8.2
NetC4_2: C4.2 R9.1 R10.1 U1.3 | length 3501.3
  Top Layer w10: U1.3 2756,2864 2756,2377 3061,2072 3061,1523 v1(3031,1493) ; R10.1 3795,1295 C4.2
  Bottom Layer w10: v1(3031,1493) 3213,1311 3679,1311 R10.1 ; C4.2 3966,1384 4584,1384 R9.1
NetC7_1: C7.1 U4.19 Y1.1 | length 1125.6
  Top Layer w10: Y1.1 3751,2514 3751,1944 C7.1
  Bottom Layer w10: C7.1 3940,1755 U4.19
NetC8_2: C8.2 R30.1 R31.2 U1.5 | length 3120.3
  Top Layer w10: v1(3133,2619) 3133,2227 C8.2 ; v1(4249,1997) 4515,1731 R31.2
  Bottom Layer w10: U1.5 2765,2655 3097,2655 v1(3133,2619) ; C8.2 3228,2132 3951,2132 4086,1997 v1(4249,1997) ; R31.2 4572,1180 4587,1165 R30.1
NetC10_2: C10.2 R22.2 U4.9 | length 1586.4
  Top Layer w10: C10.2 3550,3615 R22.2 v1(3550,2755)
  Bottom Layer w10: v1(3550,2755) U4.9
NetC11_1: C11.1 IC3.1 | length 1214.9
  Top Layer w10: IC3.1 2499,1435 2456,1478 2350,1478 2335,1463 2335,1103 2350,1088 2812.5,1088 2825,1100.5 C11.1
NetC_1: C.1 R5.1 U2.4 | length 5062.1
  Top Layer w10: R5.1 4604,1331 4604,1715 4679,1790 v1(4679,3430)
  Bottom Layer w10: U2.4 2610,4045 C.1 4662.5,3920 4679,3903.5 v1(4679,3430)
NetC_2: C.2 R6.1 T.1 | length 1199.9
  Top Layer w10: R6.1 2550,3655 C.2
  Bottom Layer w10: T.1 2035,3045 R6.1
NetD1_1: D1.1 R1.1 | length 253
  Bottom Layer w10: R1.1 3145,2435 D1.1
NetD1_2: D1.2 T122.1 U1.8 | length 1326.4
  Bottom Layer w10: T122.1 2290,2485 2315,2460 2970,2460 U1.8 3045,2535 D1.2
NetD3_1: D3.1 R15.2 | length 174.1
  Top Layer w10: R15.2 5390,3090 5400,3100 D3.1
NetD4_2: D4.2 R25.2 | length 256.1
  Bottom Layer w10: D4.2 3510,2825 R25.2
NetD5_2: D5.2 R26.1 | length 152.4
  Bottom Layer w10: D5.2 3535,2310 R26.1
NetIC3_2: IC3.2 P7.1 | length 231.7
  Top Layer w10: P7.1 2513,1401.22 2529.22,1385 IC3.2
NetIC3_3: IC3.3 P7.2 | length 295.4
  Top Layer w10: P7.2 2570,1335 IC3.3
NetQ1_2: Q1.2 R27.2 | length 174.1
  Bottom Layer w10: R27.2 5295,1825 5305,1815 Q1.2
NetQ2_2: Q2.2 R28.2 | length 182.1
  Bottom Layer w10: R28.2 5290,2070 5295,2075 Q2.2
NetQ3_2: Q3.2 R29.2 | length 190
  Bottom Layer w10: R29.2 Q3.2
NetR2_1: R2.1 R6.2 U1.2 | length 684.5
  Top Layer w10: R2.1 2330,3480 R6.2 2550,3170 U1.2
NetR2_2: R2.2 R12.1 T2.1 U1.1 | length 1311
  Top Layer w10: R12.1 2315,3150 2330,3165 R2.2
  Bottom Layer w10: T2.1 1883,2692 1883,2883 2114,2884 R12.1 2515,3085 2535,3105 U1.1
NetR3_3: R3.3 U1.9 | length 824.2
  Top Layer w10: U1.9 3056,2564 v1(3056,2181)
  Bottom Layer w10: R3.3 v1(3056,2181)
NetR4_1: R4.1 U2.1 | length 1401.9
  Top Layer w10: U2.1 2130,3130 R4.1
NetR7_1: R7.1 R11.2 T21122.1 U1.7 | length 1013
  Top Layer w10: R7.1 2635,2355 v1(2635,2505)
  Bottom Layer w10: T21122.1 2275,2295 R11.2 2415,2265 2425,2255 R7.1 ; v1(2635,2505) U1.7
NetR11_1: R11.1 R12.2 U1.6 | length 650.7
  Top Layer w10: R11.1 2305,2670 2315,2680 R12.2
  Bottom Layer w10: R11.1 2345,2605 U1.6
NetR13_1: R13.1 U4.39 | length 157.1
  Bottom Layer w10: U4.39 4810,3455 4815,3460 R13.1
NetR14_1: R14.1 U4.38 | length 157.1
  Bottom Layer w10: U4.38 4810,3355 4815,3360 R14.1
NetR16_1: R16.1 U4.37 | length 162.1
  Bottom Layer w10: U4.37 4812,3255 4817,3260 R16.1
NetR17_1: R17.1 U4.36 | length 164.1
  Bottom Layer w10: U4.36 4810,3155 4820,3165 R17.1
NetR18_1: R18.1 U4.35 | length 168.3
  Bottom Layer w10: U4.35 4805,3055 4825,3075 R18.1
NetR19_1: R19.1 U4.34 | length 171.2
  Bottom Layer w10: U4.34 4810,2955 4825,2970 R19.1
NetR20_1: R20.1 U4.33 | length 159.1
  Bottom Layer w10: U4.33 4807,2855 4817,2865 R20.1
NetR21_1: R21.1 U4.32 | length 152.1
  Bottom Layer w10: U4.32 4807,2755 4812,2750 R21.1
NetR23_1: R23.1 S2.1 U4.1 | length 584.5
  Top Layer w10: U4.1 4135,3755 4150,3770 R23.1
  Bottom Layer w10: S2.1 4030,3575 4050,3555 U4.1
NetR24_1: R24.1 S3.1 U4.4 | length 1492.7
  Bottom Layer w10: R24.1 3710,3285 S3.1 3970,3255 U4.4
NetR25_1: R25.1 U4.8 | length 187.4
  Bottom Layer w10: R25.1 3990,2855 U4.8
NetR26_2: R26.2 U4.14 | length 212.8
  Bottom Layer w10: R26.2 4000,2255 U4.14
NetR27_1: R27.1 U4.22 | length 204
  Bottom Layer w10: U4.22 4805,1825 R27.1
NetR28_1: R28.1 U4.25 | length 171.2
  Bottom Layer w10: U4.25 4810,2055 4825,2070 R28.1
NetR29_1: R29.1 U4.28 | length 161.2
  Bottom Layer w10: U4.28 4805,2355 4820,2370 R29.1
P1.4: IC3.8 U4.5 | length 3760.4
  Top Layer w10: IC3.8 2792,1435 2791,1434 2791,1347 2699,1255 2699,1110 2700,1109 2779,1109 2780,1110 2780,1175 2830,1225 3283.5,1225 3296,1237.5 3296,1553 3402.5,1659.5 4068.5,1659.5 4084,1675 4084,3104 U4.5
P1.5: IC3.7 U4.6 | length 2772.3
  Top Layer w10: IC3.7 3178.25,1385 3245.25,1452 3245.25,1872.25 3588,2215 v1(3588,3092)
  Bottom Layer w10: v1(3588,3092) 4098,3092 U4.6
P1.6: IC3.6 U4.7 | length 2661
  Top Layer w10: IC3.6 3209.63,1335 3255.51,1380.88 3255.51,1792 3686,2222.49 3686,2410 3649,2447 3649,2624 3701,2676 3701,2870 v1(3672,2899)
  Bottom Layer w10: v1(3672,2899) 3728,2955 U4.7
P30: P6.2 U4.10 | length 2645.1
  Top Layer w10: U4.10 4094.31,2614.31 4094.31,2430.69 4111,2414 4271,2414 4598,2741 4598,3487.5 4610.5,3500 4748.5,3500 4776,3527.5 4776,3971 P6.2
P31: P6.3 U4.11 | length 2300.7
  Top Layer w10: v1(4834,2905) 4834,3929 P6.3
  Bottom Layer w10: U4.11 4485,2905 v1(4834,2905)
SIGNAL: U4.15 U4.21 | length 807.1
  Bottom Layer w10: U4.15 4635,1655 U4.21
pads on no net: *.6 P3.0 S1.0 S1.3 T9.1 T14.1 T15.1 T16.1 U1.12 U1.13 U1.14 U4.2 U4.3 U4.12 U4.13 U4.16 U4.17 U4.23 U4.24 U4.26 U4.27 U4.29 U4.30

## Silkscreen, mask and mechanical layers (free items; w line width, h text height)
Mechanical 1:
  lines w10: 5725,1030 5725,4925 1715,4925 1715,1030 5875,1025 5885,1070